# Altium PCB WS485H-V1.PcbDoc
Units mm, origin at the board's own origin, x right, y up, seen from the top; angles counter-clockwise.
Board outline 80.13 x 50.13 mm, 2 copper layers (TopLayer, BottomLayer); 88 components, 71 nets, 303 pads, 390 vias.
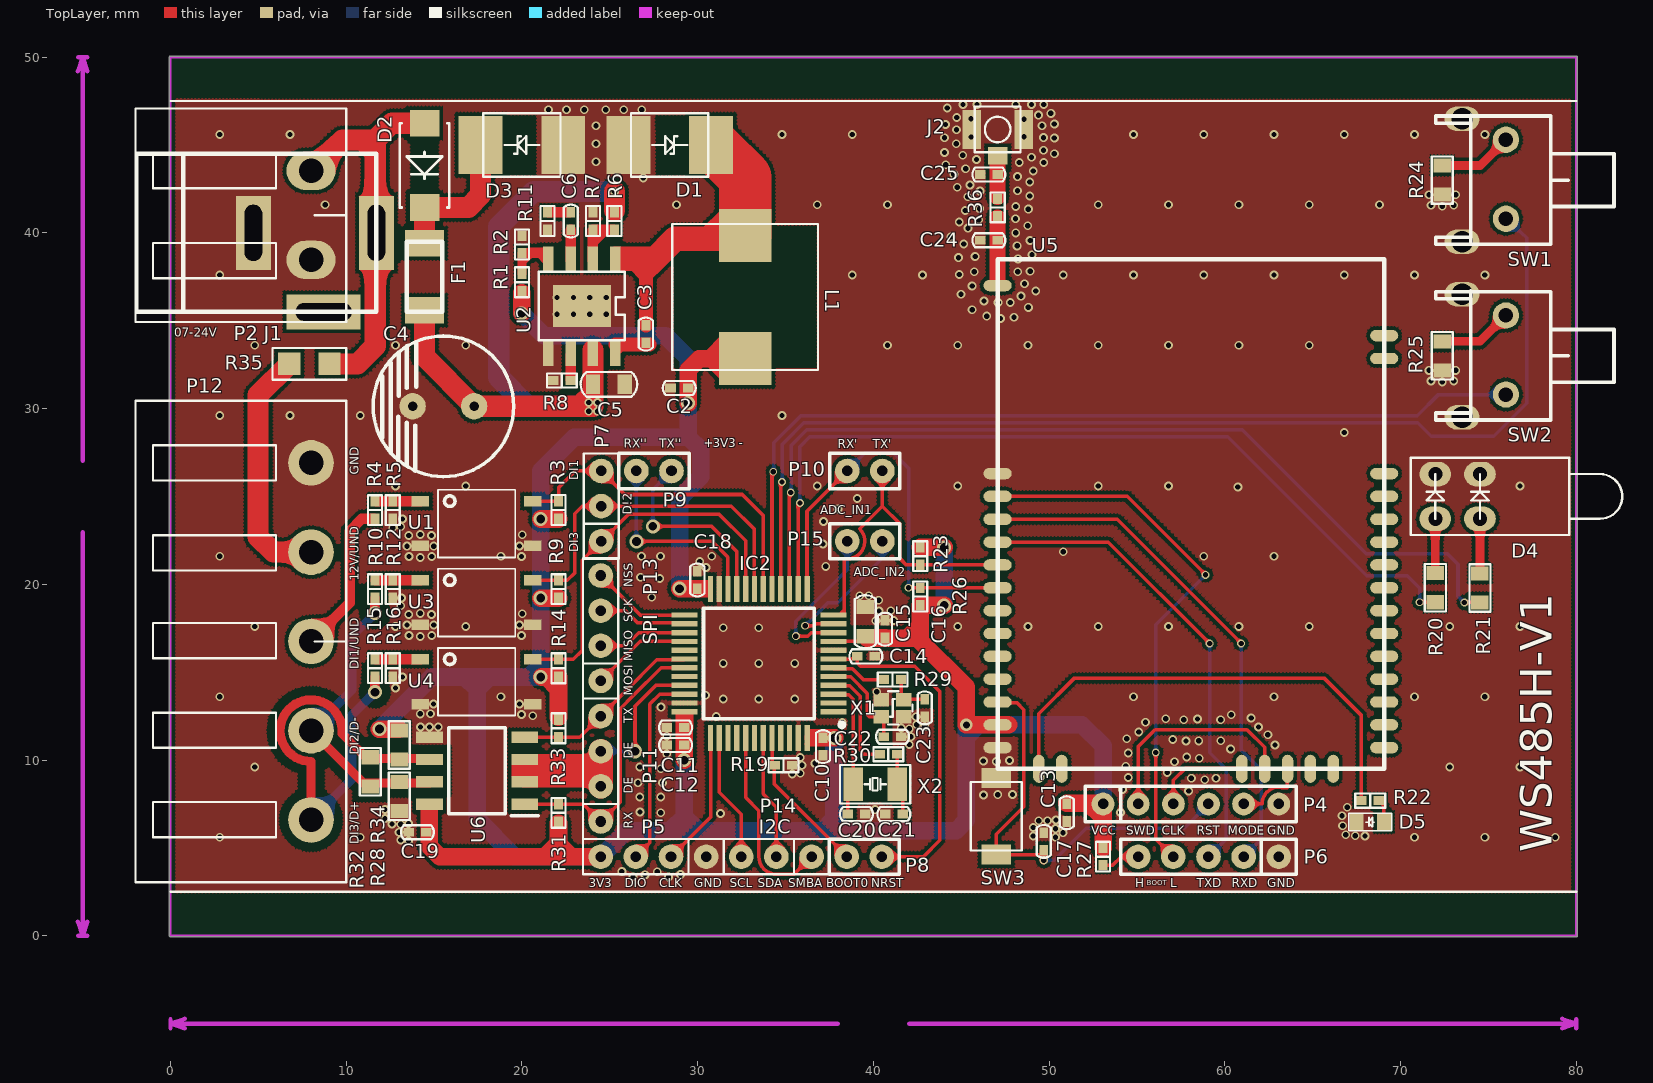
[diagram p0: TopLayer view]
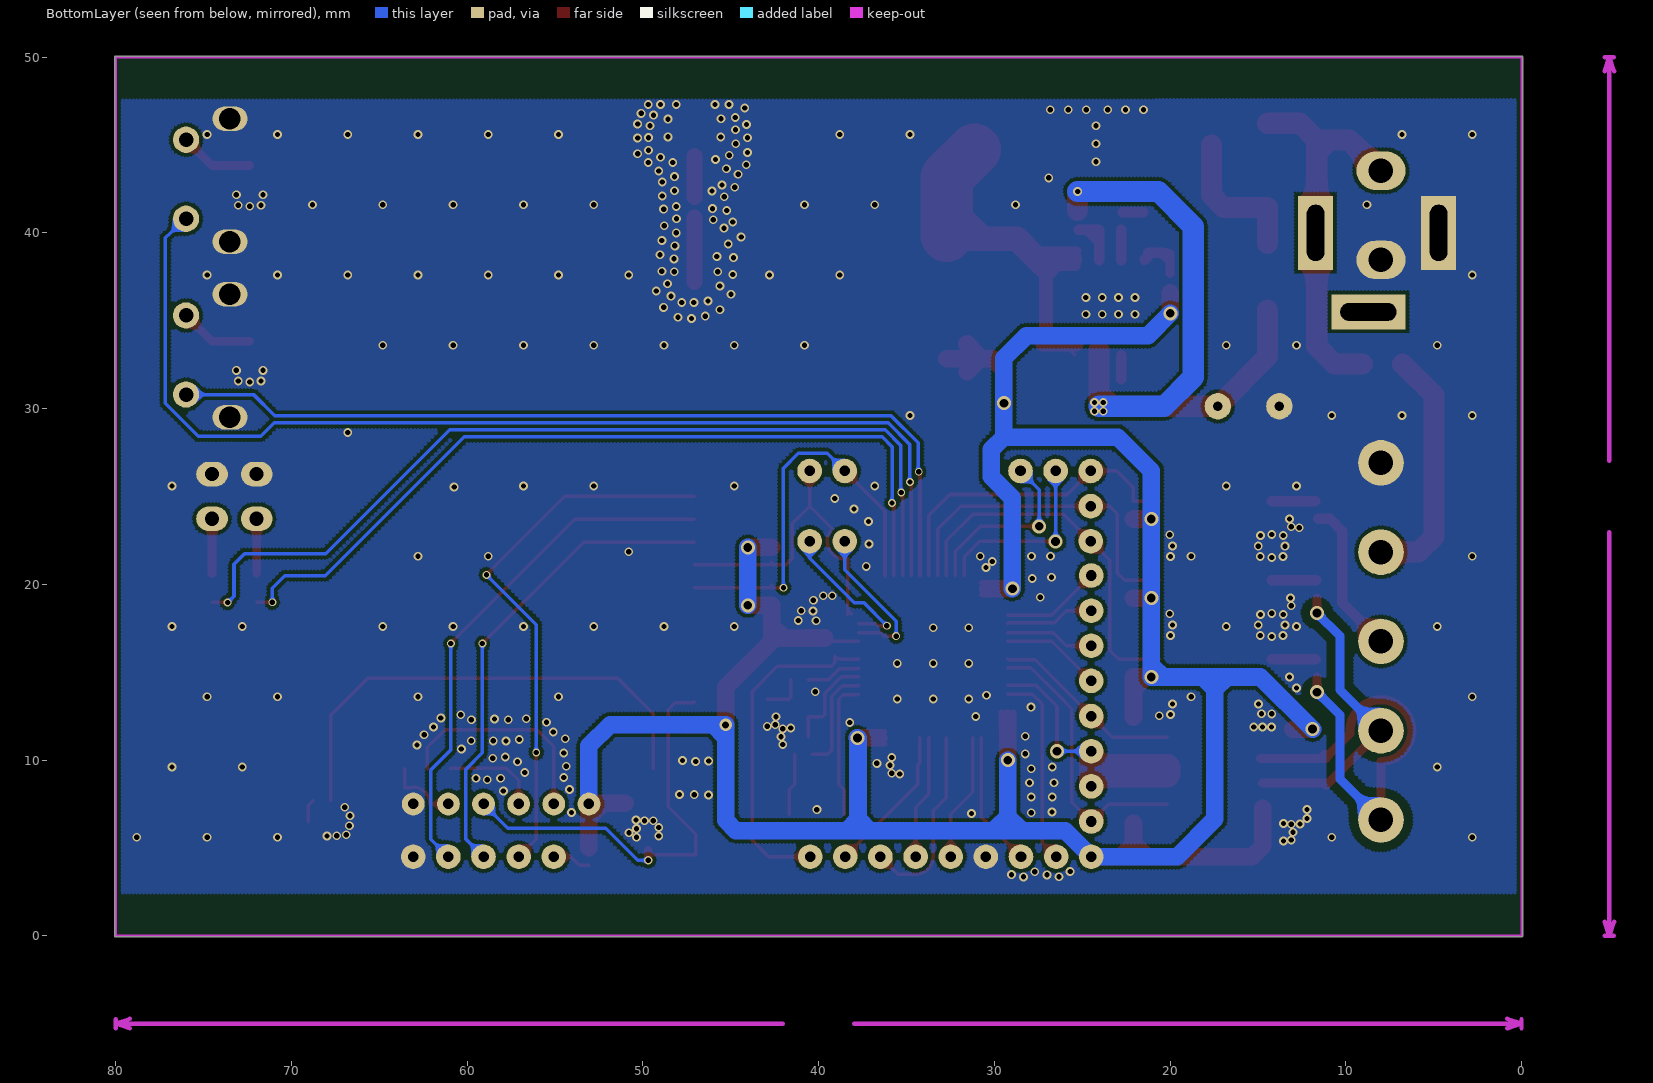
[diagram p1: BottomLayer view, seen from below]

## Layer stack, top to bottom
TopSolder: solder mask 0.0102, Solder Resist, Dk 3.5
TopLayer: signal copper 0.0356
Dielectric1: core 0.32, FR-4, Dk 4.8
BottomLayer: signal copper 0.0356
BottomSolder: solder mask 0.0102, Solder Resist, Dk 3.5

## Board outline
0,-0.064 cw(c0,0) -0.064,0 -0.064,50 cw(c0,50) 0,50.064 80,50.064 cw(c80,50) 80.064,50 80.064,0 cw(c80,0) 80,-0.064

## Design rules (kind name [scope] priority, off if disabled: settings)
Clearance Clearance_2 [(InNet('D+')) vs (InNet('GND'))] p1: gap=0.5 ignorepadtopadclearanceinfootprint=FALSE except(0: Arc-Hole Track-Hole SMDPad-Hole THPad-Hole Via-Hole Fill-Hole Poly-Hole Region-Hole Text-Hole)
Clearance Clearance_1 [(InNet('D-')) vs (InNet('GND'))] p2: gap=0.5 ignorepadtopadclearanceinfootprint=FALSE except(0: Arc-Hole Track-Hole SMDPad-Hole THPad-Hole Via-Hole Fill-Hole Poly-Hole Region-Hole Text-Hole)
Clearance [All] p3: gap=0.2 ignorepadtopadclearanceinfootprint=FALSE except(0: Arc-Hole Track-Hole SMDPad-Hole THPad-Hole Via-Hole Fill-Hole Poly-Hole Region-Hole Text-Hole)
ComponentClearance [All] p1 off: gap=0.254 collisioncheckmode=3 verticalgap=0.254 showdistances=FALSE
DiffPairsRouting [(InNet('D+') AND InNet('D-'))] p1: maxlimit=0.152 minlimit=0.152 mostfreqgap=0.152 toplayer_minwidth=0.381 toplayer_maxwidth=0.381 toplayer_prefwidth=0.381 bottomlayer_minwidth=0.381 bottomlayer_maxwidth=0.381 bottomlayer_prefwidth=0.381 maxuncoupledlength=12.7
FabricationTestPointUsage TestPointUsage [All] p1: valid=0 allowmultiple=FALSE
FabricationTestpoint Testpoint [(IsPad And (OnTopLayer Or OnBottomLayer))] p1: side=3 testpointundercomponent=TRUE minsize=1.016 maxsize=2.54 preferedsize=1.524 minholesize=0.508 maxholesize=1.016 preferedholesize=0.813 testpointgrid=0.025 allowsidetop=TRUE allowsidebottom=TRUE usegrid=TRUE gridtolerance=0
HoleSize [All] p1: absolutevalues=TRUE maxlimit=5.5 minlimit=0.025 maxpercent=80.000 minpercent=20.000
HoleToHoleClearance [All] p1 off: gap=0.254 allowstackedmicrovias=TRUE
MinimumSolderMaskSliver [All] p1 off: minsoldermaskwidth=0.254
PolygonConnect [All] p1: connectstyle=Direct reliefconductorwidth=0.6 reliefentries=4 polygonreliefangle="90 Angle" airgapwidth=0.254
RoutingVias [All] p1: holewidth=0.4 width=0.7 viastyle="Through Hole" minholewidth=0.3 minwidth=0.5 maxholewidth=0.8 maxwidth=0.8
SilkToSilkClearance [All] p1 off: silktosilkclearance=0.254
SilkToSolderMaskClearance SilkscreenOverComponentPads [IsPad] p1 off: minsilkscreentomaskgap=0.254 clearancetoexposedcopper=TRUE
SolderMaskExpansion [All] p1: expansion=0.102 istentingtop=FALSE
Width Width_1 [(InNet('D+') AND InNet('D-'))] p1: maxlimit=0.261 minlimit=0.261 preferedwidth=0.261
Width [All] p2: maxlimit=5 minlimit=0.2 preferedwidth=0.8
21 further rules are at their usual default settings.

## Classes and differential pairs
component class WS485H-V1-BlockDiagram: *1 *2 *3 *4 *5 *6 *7 *8 *9 *10 *11 *12 *13

## Components (designator, comment, footprint, x,y, rotation, side; value= is the part's Value field where it differs from the comment)
C2 "22uF/10V" 0402C 28.953,31.17 r0 top
C3 "0.1uF" 0402C 27.053,34.241 r90 top
C4 "100uF/25V" "DIP CAP-8*3.5" 17.28,30.13 r180 top
C5 "10uF/25V" 0805C 24.95,31.378 r180 top
C6 "150pF" 0402C 22.78,40.673 r270 top
C10 "0.1uF" 0402C 37.134,10.76 r90 top
C11 "0.1uF" 0402C 28.744,11.85 r180 top
C12 "0.1uF" 0402C 28.744,10.85 r180 top value=4.7uf
C13 "0.1uF" 0402C 51.005,7 r90 top
C14 "0.1uF" 0402C 39.572,15.9 r180 top
C15 "0.1uF" 0603C 39.542,17.87 r90 top value=10nF
C16 "0.1uF" 0402C 40.665,17.444 r90 top value=1uF
C17 "0.1uF" 0402C 49.695,5.369 r90 top
C18 "0.1uF" 0402C 29.982,20.248 r90 top
C19 "0.1uF" 0402C 14.05,5.89 r180 top
C20 "10pF" 0402C 39.036,6.92 r0 top
C21 "10pF" 0402C 41.164,6.92 r180 top
C22 "8.2pF" 0402C 41.092,11.326 r0 top
C23 "8.2pF" 0402C 42.92,12.965 r270 top
C24 "NC" 0402C 46.57,39.579 r0 top
C25 "NC" 0402C 46.57,43.321 r0 top
D1 "SS34" SMBJ40CA(TVS) 28.403,45.001 r0 top
D2 "M7A" DIODE-SMA 14.455,46.24 r180 top
D3 "SMBJ24A 600W" SMBJ40CA(TVS) 20,45 r180 top
D4 "LED-TWO" LEDX2HOLD 73.25,25 r270 top
D5 "Green_LED" LED0603--0.4mm 68.275,6.474 r180 top
F1 "FUSE 1206 24V-1A" 1206-FUSE 14.455,37.5 r0 top
IC2 "STM32F301C8T6" QFP50P900X900X160-48N 33.482,15.5 r180 top locked
J1 "DC JACK-2.5T" "DC JACK-2.5T-NEW" 4.713,40 r270 top
J2 "I-PEX-CON" I-PEX-CON 47.07,44.384 r270 top
L1 "15uH" L8.3x8.3 32.7,36.347 r270 top locked
P2 "CON2-5.08mm" OQ5.08-90D-2P 8,41 r270 top
P4 "6PIN-200" 6PIN-200 53.07,7.5 r0 top locked
P5 "4PIN-200" 4PIN-200 30.482,4.5 r180 top value=MicroUSB
P6 "5Pin-200" 5pin-200 63.07,4.5 r180 top
P7 "PIN3" 3PIN-200 24.512,22.45 r90 top
P8 "2PIN-200/NC" 2PIN-200 38.482,4.5 r0 top
P9 "2PIN-200" 2PIN-200 26.512,26.45 r0 top
P10 "2PIN-200" 2PIN-200 40.512,26.45 r180 top
P11 "4PIN-200" 4PIN-200 24.482,6.5 r90 top value=MicroUSB
P12 "HD-515R8 5.08 pitch工業接線端子" OQ5.08-90D-5P 8,16.75 r270 top
P13 "4PIN-200" 4PIN-200 24.482,14.5 r90 top value=MicroUSB
P14 "PIN3" 3PIN-200 36.482,4.5 r180 top
P15 "2PIN-200" 2PIN-200 38.512,22.45 r0 top
R1 "210K 1%" 0402 19.999,37.186 r270 top value="120K 1%"
R2 "40.2K 1%" 0402 19.999,39.341 r270 top
R3 "10K" 0402 22.082,24.225 r270 top
R4 "1K" 0402 11.635,24.222 r90 top
R5 "10K" 0402 12.651,24.222 r90 top
R6 "100K" 0402 25.26,40.673 r90 top
R7 "24.9K" 0402 24.047,40.673 r270 top
R8 "100K" 0402 22.27,31.593 r0 top
R9 "10K" 0402 22.082,19.725 r270 top
R10 "1K" 0402 11.635,19.725 r90 top
R11 "100K" 0402 21.45,40.673 r90 top
R12 "10K" 0402 12.651,19.725 r90 top
R14 "10K" 0402 22.082,15.225 r270 top
R15 "1K" 0402 11.635,15.226 r90 top
R16 "10K" 0402 12.651,15.226 r90 top
R19 "10K" 0402 34.882,9.7 r180 top
R20 "220R" 0603 71.98,19.805 r270 top
R21 "220R" 0603 74.52,19.79 r270 top
R22 "220R" 0402 68.275,7.689 r180 top
R23 "10K" 0402 42.668,21.602 r90 top
R24 "220R" 0603 72.375,43 r270 top
R25 "220R" 0603 72.375,33 r270 top
R26 "10K" 0402 42.668,19.302 r270 top
R27 "1K" 0402 53.07,4.5 r270 top
R28 "3.3K" 0603 13.02,7.935 r90 top
R29 "390R" 0402 41.092,14.579 r0 top
R30 "0R" 0402 40.85,10.324 r0 top
R31 "10K" 0402 22.082,6.995 r270 top
R32 "120R/NC" 0603 11.366,9.33 r90 top
R33 "10K" 0402 22.082,11.805 r90 top
R34 "3.3K" 0603 13.02,10.856 r90 top
R35 "0R" 0805 7.907,32.542 r180 top value=0R/NC
R36 "0R" 0402 47.07,41.45 r90 top
SW1 "DTSM63N" SW-AT-1102VT1-new 74.75,43 r90 top
SW2 "DTSM63N" SW-AT-1102VT1-new 74.75,33 r90 top
SW3 "Push  Button" Button_2pin-3*4*2MM 46.995,6.794 r270 top value=Switch-SMD-6x6mm
U1 "IS181" IS181-SMD 17.416,23.455 r0 top
U2 "MP1584EN-LF-Z" SOIC8E_MP1584EN 23.404,35.834 r180 top
U3 "IS181" IS181-SMD 17.416,18.955 r0 top
U4 "IS181" IS181-SMD 17.416,14.455 r0 top locked
U5 "WS101A" WS101A 58.07,24.002 r0 top locked
U6 "MAX3485" SOIC127P600X175-8N 17.445,9.395 r180 top
X1 "16MHz / 8pF" XTAL-SMD-20X16 41.132,12.965 r0 top
X2 "32.768KHz / 12pF" XTAL-SMD-32*15 40.1,8.62 r0 top

## Footprints (in the part's own frame and the unit in brackets; to place one, negate y for a bottom-side part, rotate by r counter-clockwise, add the part's x,y. Pads: shape width x height; smd on the part's side, far side on the other; paste and mask are expansions set on the pad)
2PIN-200 [mm] "Connector; Header; 2 Position"
  round 1.4 hole 0.6: 1(0,0) 2(2,0)
  silkscreen extent -1,-1 3,1
3PIN-200 [mm]
  round 1.4 hole 0.6: 1(0,0) 2(2,0) 3(4,0)
  silkscreen extent -1,-1 5,1
4PIN-200 [mm]
  round 1.4 hole 0.6: 1(0,0) 2(2,0) 3(4,0) 4(6,0)
  silkscreen extent -1,-1 7,1
5pin-200 [mm]
  round 1.4 hole 0.6: 1(0,0) 2(2,0) 3(4,0) 4(6,0) 5(8,0)
  silkscreen extent -1,-1 9,1
6PIN-200 [mm]
  round 1.3 hole 0.6: 1(0,0) 2(2,0) 3(4,0) 4(6,0) 5(8,0) 6(10,0)
  silkscreen extent -1,-1 11,1
0402 [mm]
  rect 0.6x0.5 smd: 1(-0.5,0) 2(0.5,0)
  silkscreen extent -0.85,-0.4 0.85,0.4
0402C [mm]
  rect 0.6x0.5 smd: 1(-0.5,0) 2(0.5,0)
  silkscreen extent -0.94,-0.4 0.94,0.4
0603 [mm]
  rect 0.8x1 smd: 1(-0.826,0) 2(0.826,0)
  silkscreen extent -1.35,-0.6 1.35,0.6
0603C [mm]
  rect 0.8x1 smd: 1(-0.826,0) 2(0.826,0)
  silkscreen extent -1.51,-0.6 1.51,0.6
0805 [mil]
  rect 50x50 smd: 1(-45,0) 2(45,0)
  silkscreen extent -82,-35 83,35
0805C [mm] "0805C"
  rect 0.8x1.1 smd: 1(-0.9,0) 2(0.9,0)
  silkscreen extent -1.61,-0.7 1.61,0.7
1206-FUSE [mm] "1206-FUSE"
  rect 2.2x1.5 smd: 1(0,1.905) 2(0,-1.905)
  silkscreen extent -1,-2 1,2
Button_2pin-3*4*2MM [mm] "Button_2pin-3*4*2MM"
  rect 1.15x1.7 smd: 1(2.175,0) 2(-2.175,0)
  silkscreen extent -1.95,-1.45 1.95,1.45
"DC JACK-2.5T-NEW" [mm] "DC JACK-2.5T-NEW"
  rect 4.2x2 hole 1 slot 3.2 at 0 deg: 1(0,7) 2(0,0)
  rect 2x4.2 hole 1 slot 3.2 at 90 deg: 3(4.498,4.001)
  silkscreen extent -4.5,-6.65 4.5,7
DIODE-SMA [mm]
  rect 1.68x1.52 smd: 1(0,0) 2(0,4.8)
  silkscreen extent -1.4,0 1.4,4.8
"DIP CAP-8*3.5" [mm]
  round 1.5 hole 0.55: 1(0,0) 2(3.5,0)
  silkscreen extent -2.25,-4 5.75,4
I-PEX-CON [mm]
  rect 1x1.1 smd: 1(0,0)
  rect 2.2x1.05 smd: 2(-1.5,1.475) 2(-1.5,-1.475)
  silkscreen extent -2.8,-1.3 -0.2,1.3
IS181-SMD [mm] "IS181-SMD"
  rect 1x0.6 smd: 1(-3.2,1.27) 2(-3.2,-1.27) 3(3.2,-1.27) 4(3.2,1.27)
  silkscreen extent -2.2,-1.93 2.2,1.93
L8.3x8.3 [mm]
  rect 3x3 smd: 1(-3.5,0) 2(3.5,0)
  silkscreen extent -4.15,-4.15 4.15,4.15
LED0603--0.4mm [mm] "LED0603--0.4mm"
  rect 0.8x0.9 smd: 1(-0.775,0) 2(0.775,0)
  silkscreen extent -1.23,-0.5 1.23,0.5
LEDX2HOLD [mm]
  oval 1.4x1.8 hole 0.8: 1(1.27,1.27) 2(-1.27,1.27) 3(1.27,-1.27) 4(-1.27,-1.27)
  silkscreen extent -2.2,-2.67 2.2,9.37
OQ5.08-90D-2P [mm]
  oval 2.2x2.8 hole 1.4: 1(-2.54,0) 2(2.54,0)
  silkscreen extent -6.08,-10 6.08,2
OQ5.08-90D-5P [mm]
  round 2.6 hole 1.4: 1(-10.16,0) 2(-5.08,0) 3(0,0) 4(5.08,0) 5(10.16,0)
  silkscreen extent -13.7,-10 13.7,2
QFP50P900X900X160-48N [mm]
  rect 1.475x0.3 smd: 1(-4.238,2.75) 2(-4.238,2.25) 3(-4.238,1.75) 4(-4.238,1.25) 5(-4.238,0.75) 6(-4.238,0.25) 7(-4.238,-0.25) 8(-4.238,-0.75) 9(-4.238,-1.25) 10(-4.238,-1.75) 11(-4.238,-2.25) 12(-4.238,-2.75) 25(4.238,-2.75) 26(4.238,-2.25) 27(4.238,-1.75) 28(4.238,-1.25) 29(4.238,-0.75) 30(4.238,-0.25) 31(4.238,0.25) 32(4.238,0.75) 33(4.238,1.25) 34(4.238,1.75) 35(4.238,2.25) 36(4.238,2.75)
  rect 0.3x1.475 smd: 13(-2.75,-4.238) 14(-2.25,-4.238) 15(-1.75,-4.238) 16(-1.25,-4.238) 17(-0.75,-4.238) 18(-0.25,-4.238) 19(0.25,-4.238) 20(0.75,-4.238) 21(1.25,-4.238) 22(1.75,-4.238) 23(2.25,-4.238) 24(2.75,-4.238) 37(2.75,4.238) 38(2.25,4.238) 39(1.75,4.238) 40(1.25,4.238) 41(0.75,4.238) 42(0.25,4.238) 43(-0.25,4.238) 44(-0.75,4.238) 45(-1.25,4.238) 46(-1.75,4.238) 47(-2.25,4.238) 48(-2.75,4.238)
  silkscreen extent -4.85,-3.15 3.15,3.62, body extent -4.5,-4.5 4.5,4.5, height 1.6
SMBJ40CA(TVS) [mm] "SMBJ40CA(TVS)"
  rect 2.5x3.3 smd: 1(-2.35,0) 2(2.35,0)
  silkscreen extent -2.2,-1.81 2.2,1.81
SOIC8E_MP1584EN [mm] "SOIC8E_MP1584EN"
  rect 3.3x2.41 smd: 0(0,0)
  rect 0.6x1.4 smd: 1(-1.905,-2.7) 2(-0.635,-2.7) 3(0.635,-2.7) 4(1.905,-2.7) 5(1.905,2.7) 6(0.635,2.7) 7(-0.635,2.7) 8(-1.905,2.7)
  silkscreen extent -2.45,-1.95 2.45,1.95
SOIC127P600X175-8N [mm]
  rect 1.525x0.65 smd: 1(-2.712,1.905) 2(-2.712,0.635) 3(-2.712,-0.635) 4(-2.712,-1.905) 5(2.712,-1.905) 6(2.712,-0.635) 7(2.712,0.635) 8(2.712,1.905)
  silkscreen extent -3.47,-2.45 1.6,2.58, body extent -3,-2.45 3,2.45, height 1.75
SW-AT-1102VT1-new [mm] "SW-AT-1102VT1-new"
  oval 1.4x2 hole 1.227: 0(-3.5,1.25) 0(3.5,1.25)
  round 1.5 hole 0.827: 1(-2.2,-1.25) 2(2.3,-1.25)
  silkscreen extent -3.65,-7.4 3.7,2.75
WS101A [mm] "Vertexcom"
  oval 1.6x0.65 smd: 1(-11,13) 2(-11,2.3) 3(-11,1) 4(-11,-0.3) 5(-11,-1.6) 6(-11,-2.9) 7(-11,-4.2) 8(-11,-5.5) 9(-11,-6.8) 10(-11,-8.1) 11(-11,-9.4) 12(-11,-10.7) 13(-11,-12) 14(-11,-13.3) 22(11,-13.3) 23(11,-12) 24(11,-10.7) 25(11,-9.4) 26(11,-8.1) 27(11,-6.8) 28(11,-5.5) 29(11,-4.2) 30(11,-2.9) 31(11,-1.6) 32(11,-0.3) 33(11,1) 34(11,2.3) 35(11,8.85) 36(11,10.15)
  oval 0.65x1.6 smd: 15(-8.65,-14.5) 16(-7.35,-14.5) 17(2.9,-14.5) 18(4.2,-14.5) 19(5.5,-14.5) 20(6.8,-14.5) 21(8.1,-14.5)
  silkscreen extent -11,-14.5 11,14.5
XTAL-SMD-20X16 [mm] "XTAL-SMD-20X16"
  rect 0.875x0.775 smd: 1(-0.675,-0.5) 2(0.6,0.475) 3(0.6,-0.5) 4(-0.675,0.475)
  silkscreen extent -1.18,-0.95 1.1,0.95
XTAL-SMD-32*15 [mm]
  rect 1.1x1.9 smd: 1(-1.25,0) 2(1.25,0)
  silkscreen extent -2,-1.1 2,1.1

## Part data
C2 C3 C5 C6 C10 C11 C12 C14 C15 C16 C17 C18: library part "Cap Semi", "Capacitor (Semiconductor SIM Model)", LatestRevisionDate=17-Jul-2002, LatestRevisionNote="Re-released for DXP Platform.", PackageReference=C1206, Published=8-Jun-2000, Publisher="Altium Limited"
C4: library part "C POL", Package Height=1.8mm, Part Number=53300833000, Rating=10V, Tolerance=20%, Bottom=20, PCB_dir=0.000000, PCB_loc=Top, PCB_x=19.129500, PCB_y=12.184000, Right=20
C13 C20 C21 C22 C23 C24 C25: library part CAP, "Capacitor"
C19: library part CAP
D1: library part "DIODE SCHOTTKY", "Schottky Diode"
D2: library part ZNQ, "Zener Diode"
D3: library part PESD5V0L1BA, "Zener Diode"
D5: library part LED, Manufacturer=Citizen, Manufacturer's Part Number=CL-170G-CD-T, Old Part Number=4317000, Package Height=1.1mm, Part Number=41100017000, VALUE_ALLEGRO=Red_LED, Bottom=20, Cost=0.48, FPLIST=mot/0805LED,dig/0805led, PCB_dir=90.000000, PCB_x=46.095000, PCB_y=6.420000, Right=40
F1: library part FUSE2, "Fuse"
IC2: "Integrated Circuit", Manufacturer_Name=STMicroelectronics, Datasheet Link=https://www.st.com/resource/en/datasheet/stm32f301c8.pdf, Height=1.6mm, Manufacturer_Part_Number=STM32F301C8T6
J1: library part DCJACK-1, "Low Voltage Power Supply Connector"
J2 P2 P8 P9 P10 P15: library part CON2, "Connector"
L1: library part Inductor, "Inductor", Code_IEC=1005, Code_JEITA=0402, LatestRevisionDate=17-Jul-2002, LatestRevisionNote="Re-released for DXP Platform.", PackageReference=0402-A, Published=8-Jun-2000, Publisher="Altium Limited"
P4: "Pin Header", LatestRevisionDate=17-Jul-2002, LatestRevisionNote="Re-released for DXP Platform.", Publisher="Altium Limited"
P5 P11 P13: library part CON4, "Connector"
P6: library part PIN5
P7 P14: "Connector"
P12: library part "Header 5", "Header, 5-Pin", LatestRevisionDate=17-Jul-2002, LatestRevisionNote="Re-released for DXP Platform.", Publisher="Altium Limited"
R1 R2 R3 R4 R5 R6 R7 R8 R9 R10 R11 R12 R14 R15 R16 R19 R20 R21 R22 R23 R24 R25 R26 R27 R28 R29 R30 R31 R32 R33 R34 R35 R36: library part "Res Semi", "Semiconductor Resistor", LatestRevisionDate=17-Jul-2002, LatestRevisionNote="Re-released for DXP Platform.", PackageReference=AXIAL-0.5, Published=8-Jun-2000, Publisher="Altium Limited"
SW1 SW2: library part SW1
SW3: library part SW1, "Push Button"
U1 U3 U4: library part Optoisolator1, "4-Pin Phototransistor Optocoupler", DatasheetDocument=Nov-2003, LatestRevisionDate=04-Mar-2005, LatestRevisionNote="Sch pins 3 & 4 Swapped.", PackageReference=DIP-4, Published=24-Mar-1999, Publisher="Altium Limited"
U6: library part ISL3178EIBZ-T, "Integrated Circuit", Manufacturer_Name="Renesas Electronics", Datasheet Link=https://www.renesas.com/en-us/www/doc/datasheet/isl3170e-71e-72e-73e-74e-75e-76e-77e-78e.pdf, Height=1.75mm, Manufacturer_Part_Number=ISL3178EIBZ-T
X1: library part XTAL-SMD-25*32
X2: library part XTAL, Text Field1=20, Text Field2=20

## Via types
v1: diameter 0.5, hole 0.3, TopLayer to BottomLayer, tented both sides, 356 vias
v2: diameter 0.8, hole 0.5, TopLayer to BottomLayer, tented both sides, 16 vias
v3: diameter 0.45, hole 0.3, TopLayer to BottomLayer, tented both sides, 13 vias
v4: diameter 0.5, hole 0.3, TopLayer to BottomLayer, tented bottom, 4 vias
v5: diameter 0.7, hole 0.4, TopLayer to BottomLayer, tented both sides, 1 vias

## Nets (pads, with @x,y where several pads share a name; then routed paths per layer and width w, separated by ;. In a path a pad name is that pad's centre, name@x,y a point inside that pad or via, vN(x,y) a via of type N, cw(c..) or ccw(c..) an arc to the next point about the centre after c; other vN are vias at no path point)
3V3: C2.2 C10.2 C11.1 C12.1 C13.2 C15.1 C16.1 C18.1 C19.1 IC2.9 IC2.24 IC2.36 IC2.48 L1.2 P4.1 P5.4 R1.2 R3.2 R9.2 R14.2 R23.2 R26.2 R27.1 R31.2 R33.2 R34.2 U5.13 U6.8 | length 197.3
  TopLayer w0.2: IC2.9 39.248,16.75 C15.1
  TopLayer w0.3: 28.894,11.84 IC2.36@28.894,12.738 ; 29.599,11.84 IC2.36@29.599,12.738 ; 29.834,19.392 IC2.24@30.732,19.392 ; 29.834,20.086 IC2.24@30.732,20.086 ; IC2.48@36.244,10.91 37.142,10.91 ; IC2.48@36.252,11.61 37.15,11.61
  TopLayer w0.6: 21.22,4.687 21.922,5.389 ; v2@21.236,14.59 21.938,13.888 ; 22.231,5.338 22.933,4.636 ; 41.94,17.21 42.4,17.67 ; 52.149,7.351 52.851,6.649
  TopLayer w1: v2(11.89,11.758) R34.2@13.018,11.758 ; U6.8@14.732,7.248 14.732,5.086 15.318,4.5 22.082,4.5 P5.4 ; v2(19.984,35.423) R1.2@19.984,36.584 ; v2(21.066,19.216) 22.081,19.216 R9.2@22.082,19.215 ; v2(21.066,23.715) R3.2@22.082,23.715 ; v2@21.117,14.723 22.08,14.723 22.082,14.721 R33.2@22.082,12.439 ; 22.082,4.54 R31.2@22.082,6.4 ; v2(28.973,19.752) C18.1@29.981,19.745 ; v2(29.232,9.991) 29.244,10.003 C12.1 29.244,11.25 29.248,11.85 29.249,11.987 29.249,12 29.252,12.378 ; v2(29.453,30.309) C2.2 29.453,32.214 30.086,32.847 L1.2 ; C18.1@29.982,19.745 30.372,19.742 ; 30.904,32.726 L1.2@31.536,32.094 ; 30.924,33.044 L1.2@31.556,33.676 ; 36.582,11.26 C10.2 v2(37.792,11.26) ; C15.1@39.642,16.944 C16.1 40.669,16.94 41.94,16.94 42.508,16.94 45.293,14.155 v5(45.293,12.002) U5.13 U5.13@47.69,12.002 ; 42.667,16.781 R26.2 R26.2 v2(44.03,18.802) ; R23.2 v2(44.03,22.102) ; C13.2@51.005,7.544 53.07,7.544 P4.1 R27.1
  BottomLayer w0.6: 16.601,14.579 17.303,13.877 ; 17.589,13.879 18.291,14.581 ; 20.215,14.837 20.917,15.539 ; 28.381,6.214 29.083,6.916 ; 29.346,6.951 30.048,6.249 ; 36.909,6.094 37.611,6.796 ; 37.871,6.792 38.573,6.09 ; 45.442,11.157 46.144,11.859
  BottomLayer w1: v2(11.89,11.758) 14.855,14.723 17.445,14.723 ; 18.443,14.723 17.445,14.723 ; 18.451,14.723 v2(21.066,14.723) v2(21.066,19.216) v2(21.066,23.715) 21.066,26.466 22.98,28.38 29.473,28.38 ; v2(19.984,35.423) 21.257,34.15 28.17,34.15 29.453,32.867 v2(29.453,30.309) 29.453,28.4 29.473,28.38 ; v2(28.973,19.752) 28.973,24.911 30.18,26.118 30.18,27.673 29.473,28.38 ; 29.232,6.1 v2(29.232,9.991) ; v2(37.792,11.26) 37.76,11.228 37.76,5.98 ; v2(44.03,18.802) v2(44.03,22.102) ; P4.1 53.07,10.8 51.868,12.002 v5(45.293,12.002) 45.293,6.566 44.707,5.98 37.76,5.98 ; 17.445,14.723 17.445,6.645 19.59,4.5 P5.4 25.962,5.98 30.048,5.98 37.76,5.98
12V: D2.1 J1.1 P2.1 R35.1 | length 23.3
  TopLayer w0.6: 10.738,45.037 11.44,44.335
  TopLayer w1.2: P2.1@8,43.5 9.785,45.285 10.738,45.285 11.65,45.285 ; R35.1 10.642,32.542 11.65,33.55 11.65,40 11.65,44.335 11.65,45.285 ; D2.1 12.605,46.24 11.65,45.285
ADC1_IN1: IC2.10 P15.1 | length 8.8
  TopLayer w0.2: v3(35.586,17.05) 36.27,17.05 36.46,17.24 37.71,17.24 IC2.10
  BottomLayer w0.2: v3(35.586,17.05) 35.586,17.896 38.512,20.822 P15.1
ADC1_IN2: IC2.11 P15.2 | length 8.6
  TopLayer w0.2: v3(36.116,17.64) 36.632,17.64 36.742,17.75 IC2.11
  BottomLayer w0.2: v3(36.116,17.64) 37.416,18.94 37.97,18.94 40.512,21.482 P15.2
BACKUP-BUTTOM: U5.20
BOOT: P6.4 U5.3 | length 31.3
  TopLayer w0.2: U5.3 54.443,25.002 v3(58.905,20.54) ; v3(56.07,10.434) 56.07,5.5 P6.4
  BottomLayer w0.2: v3(56.07,10.434) 56.07,17.705 v3(58.905,20.54)
BOOT0: IC2.44 P8.1 R19.2 | length 8.5
  TopLayer w0.2: IC2.44 34.232,9.84 34.372,9.7 34.372,8.628 38.482,4.518 P8.1
D+: P12.5 R15.1 R32.2 R34.1 U6.6 | length 27.6
  TopLayer w0.514: 7.98,9.913 cw(c8,11.67) 9.75,11.518 10.97,10.299 11.223,10.299 R32.2 ; P12.5 8,9.893 ; R32.2@10.955,10.314 R32.2@11.164,10.104 ; R32.2@11.134,10.097 U6.6@14.861,10.097 ; v2(11.631,13.86) v2@11.635,13.864 ; v2@11.636,13.864 R15.1
  BottomLayer w0.514: P12.5 10.34,8.93 10.34,12.569 v2(11.631,13.86)
D-: P12.4 R10.1 R28.2 R32.1 U6.7 | length 17.2
  TopLayer w0.514: P12.4 R32.1@11.13,8.54 ; R32.1@11.006,8.693 U6.7@14.733,8.693 ; R10.1 11.635,18.365 v2(11.64,18.36)
  BottomLayer w0.514: P12.4 10.34,14.01 10.34,17.06 v2(11.64,18.36)
DI1: P12.3 R4.1 | length 8.8
  TopLayer w0.6: P12.3 10.19,18.94 10.19,23.02 10.892,23.722 R4.1@11.556,23.722
GND: C2.1 C4.2 C5.1 C10.1 C11.2 C12.2 C13.1 C14.1 C15.2 C16.2 C17.2 C18.2 C19.2 C20.2 C21.2 C22.2 C23.2 C24.1 C25.1 D1.1 D3.1 D4.2 D4.4 D5.2 IC2.8 IC2.23 IC2.35 IC2.47 J1.2 J2.2 P2.2 P4.6 P5.1 P6.1 P12.1 R2.1 R5.1 R7.1 R8.1 R11.1 R12.1 R16.1 R19.1 R24.2 R25.2 R28.1 SW1.0 SW2.0 SW3.2 U1.2 U1.3 U2.0 U2.5 U3.2 U3.3 U4.2 U4.3 U5.2 U5.14 U6.5 X1.3 X1.4
  other v1: 26.318,3.353 28.341,3.35 27.009,3.464 29.029,3.477 27.703,3.638 25.687,3.656 13.55,5.39 13.099,5.444 2.8,5.6 10.8,5.6 50.36,5.6 70.8,5.6 74.8,5.6 78.8,5.6 49.1,5.67 67.428,5.686 67.975,5.68 66.88,5.746 50.79,5.86 13,5.89 50.368,6.095 49.1,6.16 66.705,6.255 12.6,6.36 13.099,6.339 13.55,6.39 49.41,6.54 49.903,6.541 50.394,6.586 12.21,6.67 66.672,6.83 31.299,6.954 27.9,7 54.069,7.019 26.713,7.041 12.21,7.18 40.1,7.177 66.962,7.317 26.7,7.9 27.9,7.9 46.27,8.01 47.08,8.03 47.92,8.04 57.94,8.24 54.18,8.32 26.6,8.7 28,8.7 58.86,8.88 58.096,8.963 59.496,8.963 54.503,9 35.382,9.2 35.833,9.251 56.722,9.294 27.9,9.5 4.8,9.6 26.7,9.6 72.8,9.6 76.8,9.6 54.36,9.65 35.932,9.7 36.685,9.809 57.14,9.9 46.26,9.94 47,9.92 47.75,9.97 58.546,10.097 35.833,10.146 57.83,10.17 28.244,10.35 54.503,10.4 60.33,10.63 62.86,10.85 42.043,10.877 57.79,11.08 58.52,11.09 59.77,11.1 57.034,11.163 54.42,11.21 42.142,11.326 28.244,11.35 28.244,11.35 62.45,11.44 55.097,11.599 42.043,11.772 41.592,11.826 61.918,11.874 14.232,11.88 14.733,11.88 14.733,11.88 15.234,11.88 42.92,11.915 42.471,12.014 38.23,12.13 55.492,12.154 57.662,12.297 59.762,12.297 58.45,12.33 56.64,12.35 61.497,12.39 31.058,12.473 42.42,12.465 20.616,12.525 19.977,12.584 60.36,12.58 14.216,12.625 14.797,12.636 27.907,13.009 14.966,13.185 19.856,13.185 19.856,13.185 31.452,13.47 33.472,13.47 35.522,13.47 2.8,13.6 18.8,13.6 54.8,13.6 62.8,13.6 70.8,13.6 74.8,13.6 30.44,13.684 40.19,13.89 40.19,13.89 12.8,14.1 13.201,14.726 31.452,15.5 33.482,15.5 35.522,15.5 14.216,17.025 13.577,17.084 14.872,17.084 19.977,17.084 31.452,17.53 33.472,17.53 4.8,17.6 12.8,17.6 16.8,17.6 44.8,17.6 48.8,17.6 52.8,17.6 56.8,17.6 60.8,17.6 64.8,17.6 72.8,17.6 76.8,17.6 13.456,17.685 13.456,17.685 14.976,17.685 14.976,17.685 19.866,17.685 40.141,17.921 41.165,17.944 13.56,18.286 14.855,18.286 20.015,18.324 14.216,18.345 40.32,18.48 40.99,18.49 13.097,18.774 40.299,19.096 13.151,19.225 27.39,19.26 39.23,19.35 39.742,19.345 27.84,20.33 26.75,20.4 30.48,20.95 37.29,21.02 30.12,21.3 14.216,21.525 2.8,21.6 13.577,21.584 14.872,21.584 18.8,21.6 19.977,21.584 26.8,21.6 27.88,21.59 30.8,21.6 58.8,21.6 62.8,21.6 50.8,21.852 13.456,22.17 13.456,22.185 14.976,22.17 14.976,22.185 19.866,22.185 37.13,22.29 13.56,22.771 14.855,22.771 14.216,22.83 20.015,22.824 12.651,23.222 13.102,23.273 37.16,23.58 13.201,23.722 37.98,24.29 39.077,24.889 60.743,25.543 12.8,25.6 16.8,25.6 36.8,25.6 44.8,25.6 52.8,25.6 56.8,25.6 76.8,25.6 66.8,28.64 2.8,29.6 6.8,29.6 10.8,29.6 34.8,29.6 72.375,31.514 71.736,31.574 73.031,31.574 71.615,32.175 73.135,32.175 4.8,33.6 12.8,33.6 16.8,33.6 40.8,33.6 44.8,33.6 48.8,33.6 52.8,33.6 56.8,33.6 60.8,33.6 64.8,33.6 47.24,35.12 48,35.2 46.456,35.26 22,35.362 22.93,35.362 23.86,35.362 24.79,35.362 45.62,35.63 48.82,35.76 47.1,36.04 47.79,36.04 46.3,36.12 22,36.317 22.93,36.317 23.86,36.317 24.79,36.317 48.4,36.4 44.99,36.51 49.24,36.69 45.62,36.97 48.6,37.1 2.8,37.6 38.8,37.6 42.8,37.6 50.8,37.6 54.8,37.6 58.8,37.6 62.8,37.6 66.8,37.6 70.8,37.6 74.8,37.6 44.89,37.63 45.74,37.79 48.22,37.79 48.92,37.82 48.23,38.52 44.84,38.59 45.79,38.65 49.03,38.75 48.18,39.26 45.14,39.37 48.92,39.56 44.41,39.77 48.1,40 45.39,40.27 48.78,40.4 44.883,40.619 46,40.75 48.092,40.798 45.226,41.278 48.82,41.35 46.037,41.38 48.1,41.5 72.375,41.514 71.736,41.574 73.031,41.574 8.8,41.6 28.8,41.6 36.8,41.6 36.8,41.6 40.8,41.6 52.8,41.6 56.8,41.6 60.8,41.6 64.8,41.6 68.8,41.6 45.37,42.05 48.9,42.1 71.615,42.175 73.135,42.175 46.068,42.386 48.2,42.4 44.77,42.59 45.499,42.728 48.9,42.9 26.905,43.13 48.2,43.2 44.58,43.34 49.1,43.52 45.25,43.65 44.12,43.88 48.3,44 49.7,44 24.215,44.051 45.872,44.17 49,44.3 45.09,44.42 50.3,44.5 44.052,44.578 49.68,44.7 44.72,45.07 24.215,45.074 50.3,45.4 44.047,45.41 49.68,45.42 2.8,45.6 6.8,45.6 34.8,45.6 38.8,45.6 54.8,45.6 58.8,45.6 62.8,45.6 66.8,45.6 70.8,45.6 74.8,45.6 44.73,45.87 24.215,46.097 49.6,46.1 44.102,46.168 50.3,46.2 44.75,46.57 49.4,46.7 50.1,46.8 21.51,47.01 22.53,47.01 23.55,47.01 24.775,47.01 25.795,47.01 26.815,47.01 44.2,47.1 45.1,47.3 45.9,47.3 48.1,47.3 49,47.3 49.7,47.3
  other v4: 45.564,45.458 48.568,45.463 45.56,46.49 48.568,46.473
I2C1_SCL: IC2.38 P14.3 | length 7.3
  TopLayer w0.2: IC2.38 31.232,8.168 32.482,6.918 P14.3
I2C1_SDA: IC2.43 P14.2 | length 7.1
  TopLayer w0.2: IC2.43 33.732,8.068 34.482,7.318 P14.2
I2C1_SMBA: IC2.41 P14.1 | length 11.1
  TopLayer w0.2: IC2.41 32.732,7.868 33.482,7.118 33.482,4.5 ccw(c34.482,4.5) 34.482,3.5 35.482,3.5 P14.1
"IOA9-DC ON": U5.21
KEY0: IC2.16 SW1.1 | length 62.5
  TopLayer w0.2: 34.722,20.488 34.722,25.717 34.797,25.792 v3(34.797,25.82)
  BottomLayer w0.2: v3(34.797,25.82) 34.825,25.848 34.825,27.969 36.046,29.19 70.983,29.19 71.743,28.43 75.31,28.43 77.18,30.3 77.18,39.72 SW1.1
KEY1: IC2.17 SW2.1 | length 50.4
  TopLayer w0.2: 34.222,20.488 34.23,20.496 34.23,26.301 34.3,26.371 v3(34.3,26.406)
  BottomLayer w0.2: v3(34.3,26.406) 34.335,26.441 34.335,28.045 35.88,29.59 70.947,29.59 72.157,30.8 SW2.1
LED1: IC2.14 R20.2 | length 48.1
  TopLayer w0.2: 35.722,20.488 35.722,24.462 35.822,24.562 v3(35.822,24.63) ; v3(71.09,18.979) R20.2
  BottomLayer w0.2: v3(35.822,24.63) 35.822,27.835 36.377,28.39 60.169,28.39 68.079,20.48 70.382,20.48 71.09,19.772 v3(71.09,18.979)
LED2: IC2.15 R21.2 | length 52.2
  TopLayer w0.2: 35.222,20.488 35.222,25.13 35.297,25.205 v3(35.297,25.23) ; v3(73.63,18.965) R21.2
  BottomLayer w0.2: v3(35.297,25.23) 35.322,25.255 35.322,27.901 36.211,28.79 60.998,28.79 68.041,21.747 72.67,21.747 73.27,21.147 73.27,19.325 v3(73.63,18.965)
LED_G: IC2.20 P7.1 R14.1 U4.4 | length 21.2
  TopLayer w0.2: U4.4 R14.1 22.925,15.725 23.43,16.23 23.43,21.368 P7.1 24.536,22.45 26.086,24 31.21,24 32.73,22.48 32.73,20.496 32.722,20.488
LED_R: IC2.18 P7.3 R3.1 U1.4 | length 18.7
  TopLayer w0.2: U1.4 R3.1 22.082,25.49 23.042,26.45 P7.3 25.852,25.11 32.53,25.11 33.722,23.918 33.722,20.488
LED_Y: IC2.19 P7.2 R9.1 U3.4 | length 19.5
  TopLayer w0.2: U3.4 R9.1 22.585,20.225 23,20.64 23,24.02 23.43,24.45 P7.2 31.92,24.45 33.207,23.163 33.207,20.503 33.222,20.488
MODE: P4.5 U5.19 | length 4.1
  TopLayer w0.2: P4.5 62.12,7.5 cw(c63.07,7.5) 63.246,8.434 63.364,8.411 ; 63.365,8.411 63.565,8.411 63.565,9.497 U5.19
NetC3_1: C3.1 U2.8 | length 2.5
  TopLayer w0.2: U2.8@25.426,33.063 25.788,33.425
  TopLayer w0.8: U2.8@25.33,33.641 C3.1@27.27,33.641
NetC3_2: C3.2 D1.2 L1.1 U2.1 | length 21.6
  TopLayer w0.5: U2.1@25.289,38.984 25.837,38.984 ; U2.1@25.339,38.083 25.887,38.083
  TopLayer w0.6: 26.303,38.183 27.005,37.481 ; 26.518,38.933 27.053,38.933 27.282,38.933 ; 27.099,37.491 27.801,38.193
  TopLayer w0.8: C3.2 27.053,37.481 27.053,38.5 27.053,38.543
  TopLayer w1.2: 30.77,39.94 L1.1@31.63,40.8
  TopLayer w1.4: 25.713,38.534 26.749,38.534 ; 27.053,38.534 27.574,38.534 28.711,39.671 32.525,39.671 L1.1
  TopLayer w3: D1.2@31.127,44.727 32.7,43.154 L1.1
NetC4_1: C4.1 C5.2 F1.2 R6.2 U2.7 | length 40.8
  TopLayer w0.6: 23.107,30.372 C5.2@23.809,31.074
  TopLayer w1.2: F1.2 14.455,32.955 C4.1 ; C4.1@17.31,30.1 C4.1 ; U2.7@24.05,33.328 24.05,31.408 C5.2 24.05,30.13 C4.1 ; R6.2@25.26,41.277 v1(25.26,42.354)
  BottomLayer w1.2: 24.05,30.13 20.333,30.13 18.68,31.783 18.68,40.363 20.67,42.354 v1(25.26,42.354)
  other v1: 23.8,29.85 24.3,29.85 23.8,30.35 24.3,30.35
NetC6_1: C6.1 R11.2 | length 1.2
  TopLayer w0.6: R11.2@21.526,41.173 C6.1@22.686,41.173
NetC6_2: C6.2 U2.3 | length 1.7
  TopLayer w0.6: U2.3@22.77,38.441 C6.2@22.77,40.164
NetC21_1: C21.1 R30.2 X2.2 | length 3.5
  TopLayer w0.2: R30.2 X2.2 41.664,8.306 C21.1
NetC23_1: C23.1 R29.2 X1.2 | length 2.4
  TopLayer w0.2: R29.2 41.592,13.58 X1.2 41.757,13.465 C23.1
NetC24_2: C24.2 R36.1 U5.1 | length 3.6
  TopLayer w0.915: U5.1@47.07,37.212 47.07,39.379 C24.2 R36.1@47.07,40.86
NetC25_2: C25.2 J2.1 R36.2 | length 2.3
  TopLayer w0.915: R36.2@47.07,42.04 C25.2 47.07,43.329 47.07,43.399 J2.1
NetD2_2: D2.2 D3.2 F1.1 | length 8.3
  TopLayer w1.2: F1.1 D2.2@14.455,41.3 ; D2.2@14.535,41.44 D2.2 16.947,41.44 17.65,42.143 D3.2
NetD4_1: D4.1 R21.1 | length 3.1
  TopLayer w0.5: R21.1 D4.1
NetD4_3: D4.3 R20.1 | length 3.1
  TopLayer w0.5: R20.1 D4.3
NetD5_1: D5.1 R22.1 | length 1.3
  TopLayer w0.2: R22.1 69.05,7.414 D5.1
NetP6_5: P6.5 R27.2 | length 2.2
  TopLayer w0.2: R27.2 53.6,4 54.1,4.5 P6.5
NetP12_2: P12.2 R35.2 | length 13.8
  TopLayer w1.2: R35.2 4.99,30.768 4.99,22.69 5.85,21.83 P12.2@7.88,21.83
NetR1_1: R1.1 R2.2 U2.4 | length 3.2
  TopLayer w0.2: 20.123,38.283 20.486,38.646
  TopLayer w0.5: R1.1 20,38.283 R2.2@20,38.831
  TopLayer w0.6: R2.2@20.207,38.838 20.486,38.838 ; 20.486,38.864 U2.4@21.25,38.864 ; 21.09,38.821 U2.4@21.453,38.458
NetR4_2: R4.2 R5.2 U1.1 | length 2.5
  TopLayer w0.6: R4.2@11.734,24.721 U1.1@14.216,24.721
NetR6_1: R6.1 R7.2 U2.2 | length 3.9
  TopLayer w0.6: 24.031,39.473 24.733,40.175 ; U2.2@24.04,38.441 R7.2@24.04,40.154 ; R7.2 R6.1@25.196,40.173
NetR8_2: R8.2 U2.6 | length 1.4
  TopLayer w0.6: R8.2@22.77,31.664 U2.6@22.77,33.041
NetR10_2: R10.2 R12.2 U3.1 | length 2.5
  TopLayer w0.6: R10.2@11.688,20.225 R12.2 U3.1
NetR15_2: R15.2 R16.2 U4.1 | length 2.5
  TopLayer w0.6: R15.2@11.697,15.725 R16.2 U4.1
NetR24_1: R24.1 SW1.2 | length 4.2
  TopLayer w0.5: R24.1 74.525,43.826 SW1.2
NetR25_1: R25.1 SW2.2 | length 4.2
  TopLayer w0.5: R25.1 74.525,33.826 SW2.2
NRST: C14.2 IC2.7 P8.2 | length 19.3
  TopLayer w0.2: IC2.7 37.725,15.745 38.755,15.745 38.76,15.75 38.922,15.75 C14.2 39.072,15.75 39.072,15.528 39.27,15.33 42.35,15.33 43.78,13.9 43.78,5.43 42.85,4.5 P8.2
OSC32-IN: C20.1 IC2.3 X2.1 | length 7.9
  TopLayer w0.2: IC2.3 37.762,13.708 38.594,13.708 38.85,13.453 X2.1 38.536,8.306 C20.1
OSC32-OUT: IC2.4 R30.1 | length 6
  TopLayer w0.2: IC2.4 37.746,14.224 38.645,14.224 39.25,13.619 39.25,10.56 39.486,10.324 R30.1
OSO_IN: C22.1 IC2.5 X1.1 | length 5.5
  TopLayer w0.2: IC2.5 37.738,14.732 38.702,14.732 39.65,13.784 39.65,12.582 39.767,12.465 X1.1 ; C22.1 X1.1@40.592,12.465
OSO_OUT: IC2.6 R29.1 | length 3.1
  TopLayer w0.2: IC2.6@37.72,15.232 37.752,15.2 38.81,15.2 39.431,14.579 R29.1
RESET: C17.1 P4.4 SW3.1 U5.12 | length 24.3
  TopLayer w0.2: U5.12 47.102,13.27 48.15,13.27 48.555,12.865 48.555,7.334 46.995,5.774 SW3.1 49.445,4.619
  TopLayer w0.5: v1(49.695,4.294) C17.1
  BottomLayer w0.2: v1(49.695,4.294) 50.295,4.294 52.121,6.12 57.69,6.12 P4.4
RS485-DE: IC2.33 P11.2 P11.3 U6.2 U6.3 | length 23.4
  TopLayer w0.2: v2(26.434,10.5) 26.434,13.057 27.627,14.25 IC2.33
  TopLayer w0.65: U6.2 P11.2@24.222,8.76 ; U6.3@20.383,10.03 P11.3@24.26,10.03 ; 23.802,9.18 P11.2@24.222,8.76 ; P11.2 P11.2@24.222,8.76 ; P11.2@24.7,8.76 24.482,8.76 P11.2@24.222,8.76
  TopLayer w1.4: 20.377,9.44 24.207,9.44 ; P11.2 24.482,8.76 P11.3
  TopLayer w1.525: 20.157,9.208 20.157,9.57
  BottomLayer w0.2: P11.3 v2(26.434,10.5)
RXD: P6.2 U5.4 | length 29.8
  TopLayer w0.2: U5.4 53.879,23.702 60.929,16.652 v3(60.929,16.634)
  BottomLayer w0.2: v3(60.929,16.634) 60.929,10.57 62.07,9.429 62.07,5.5 P6.2
SPI2_MISO: IC2.27 P13.2 | length 5.1
  TopLayer w0.2: P13.2 25.9,16.5 26.65,17.25 IC2.27
SPI2_MOSI: IC2.28 P13.1 | length 5.7
  TopLayer w0.2: P13.1 25.482,15.5 26.732,16.75 IC2.28
SPI2_NSS: IC2.25 P13.4 | length 5.7
  TopLayer w0.2: P13.4 26.732,18.25 IC2.25
SPI2_SCK: IC2.26 P13.3 | length 5.1
  TopLayer w0.2: P13.3 25.9,18.5 26.6,17.8 28.489,17.8 29.194,17.8 IC2.26
SWCLK: IC2.37 P5.2 | length 7.7
  TopLayer w0.2: P5.2 30.732,6.75 IC2.37
SWCLK-W: P4.3 U5.17 | length 5.5
  TopLayer w0.2: P4.3 57.07,8.84 57.76,9.53 60.942,9.53 U5.17
SWD-W: P4.2 U5.18 | length 12.5
  TopLayer w0.2: P4.2 55.07,10.77 56.03,11.73 61.26,11.73 62.27,10.72 U5.18
SWDIO: IC2.34 P5.3 | length 11.2
  TopLayer w0.2: P5.3 27.28,5.298 27.28,13.184 27.836,13.74 29.234,13.74 IC2.34
TXD: P6.3 U5.5 | length 27.4
  TopLayer w0.2: U5.5 53.368,22.402 v3(59.135,16.634)
  BottomLayer w0.2: P6.3 60.07,5.5 60.07,9.482 59.135,10.417 v3(59.135,16.634)
UART1-RX: IC2.31 P11.1 R31.1 U6.1 | length 16.2
  TopLayer w0.2: U6.1@20.162,7.495 R31.1 23.487,7.495 P11.1 25.588,7.606 25.588,12.921 26.307,13.64 27.917,15.25 IC2.31
UART1-TX: IC2.30 P11.4 R33.1 U6.4 | length 10.9
  TopLayer w0.2: U6.4 22.077,11.3 R33.1 23.287,11.305 P11.4 25.894,13.912 27.682,15.7 29.194,15.7 IC2.30
UART3_RX: IC2.22 P9.1 | length 10.6
  TopLayer w0.2: v2(26.512,22.44) 30.827,22.44 31.715,21.553 31.715,20.495 31.722,20.488
  BottomLayer w0.2: v2(26.512,22.44) P9.1
UART3_TX: IC2.21 P9.2 | length 10.3
  TopLayer w0.2: v2(27.45,23.3) 30.79,23.3 32.222,21.868 32.222,20.488
  BottomLayer w0.2: v2(27.45,23.3) 27.45,25.388 P9.2
USART2-RX: IC2.13 P10.2 R26.1 U5.7 | length 23.1
  TopLayer w0.2: 36.222,20.488 36.222,24.16 P10.2 ; v3(42,19.802) R26.1 ; R26.1@42.668,19.952 42.818,19.802 U5.7
  BottomLayer w0.2: P10.2 39.512,27.45 41.15,27.45 42,26.6 v3@42,19.786
USART2-TX: IC2.12 P10.1 R23.1 U5.6 | length 18.9
  TopLayer w0.2: IC2.12@38.13,18.33 38.32,18.52 ; IC2.12@38.353,18.3 38.353,18.52 38.353,21.451 38.508,21.45 ccw(c38.512,22.45) 39.219,23.157 40.508,24.446 ; P10.1 40.508,26.446 40.508,24.446 ; R23.1 41.88,21.102 41.512,21.47 41.512,23.442 40.508,24.446 ; R23.1@42.668,21.252 42.818,21.102 U5.6
WISUN-KEY0: U5.16
WISUN-LED1: R22.2 U5.15 | length 28.1
  TopLayer w0.2: U5.15 49.42,12.64 51.444,14.664 65.646,14.664 67.775,12.535 R22.2
pads on no net: IC2.1 IC2.2 IC2.29 IC2.32 IC2.39 IC2.40 IC2.42 IC2.45 IC2.46 J1.3 U5.8 U5.9 U5.10 U5.11 U5.22 U5.23 U5.24 U5.25 U5.26 U5.27 U5.28 U5.29 U5.30 U5.31 U5.32 U5.33 U5.34 U5.35 U5.36

## Polygon pours and split planes (outlines as drawn)
GND on BottomLayer "TopLayer-No Net 1" (hatched 90Degree grid 0.2 track 0.2, remove dead copper, pour order 1001): 79.99,0.01 79.99,50.01 -0.01,50.01 -0.01,0.01
GND on TopLayer "TopLayer-No Net 1" (hatched 90Degree grid 0.2 track 0.2, remove dead copper, pour order 1000): 79.973,0.01 79.973,50.01 -0.027,50.01 -0.027,0.01

## Keep-outs
KeepOutLayer:
  lines w0.127: 0,0 80,0 80,50 0,50 0,0
  lines w0.254: -5.267,0.8 -5,0 ; -5.267,49.2 -5,50 ; -5.254,0 -4.746,0 ; -5.254,50 -4.746,50 ; -5,22.97 -5,0 ; -5,27.03 -5,50 ; -4.733,0.8 -5,0 ; -4.733,49.2 -5,50 ; 0,-5.254 0,-4.746 ; 0.8,-5.267 0,-5 ; 0.8,-4.733 0,-5 ; 37.97,-5 0,-5 ; 42.03,-5 80,-5 ; 79.2,-5.267 80,-5 ; 79.2,-4.733 80,-5 ; 80,-5.254 80,-4.746
  text "50mm" at -4.5,23.224 h0.8 r90
  text "80mm" at 38.224,-5.5 h0.8

## Other copper
TopLayer:
  pour cut-out: 80.071,47.551 80.071,50.065 -0.057,50.065 -0.057,47.561
  pour cut-out: 36.85,40.497 36.85,32.197 28.55,32.197 28.55,40.497
  pour cut-out: 29.512,43.186 29.512,46.786 27.512,46.786 27.512,46.736 27.522,43.186
  pour cut-out: 20.888,43.192 20.888,46.792 18.888,46.792 18.888,46.742 18.898,43.192
  pour cut-out: 36.85,40.497 36.85,32.197 28.55,32.197 28.55,40.497
  pour cut-out: 39.4,7.52 40.802,7.52 40.802,9.775 39.4,9.775
  pour cut-out: 13.55,45.45 15.35,45.45 15.35,42.25 13.55,42.25
  pour cut-out: 80.064,-0.005 80.064,2.509 -0.064,2.509 -0.064,0.005
BottomLayer:
  pour cut-out: 80.065,47.553 80.065,50.067 -0.063,50.067 -0.063,47.563
  pour cut-out: 80.064,-0.074 80.064,2.44 -0.064,2.44 -0.064,-0.064

## Silkscreen, mask and mechanical layers (free items; w line width, h text height)
TopOverlay:
  lines w0.127: 0,2.5 80,2.5 ; 0,47.5 80,47.5
  text "07-24V" at 0.2,34.1 h0.5
  text "+" at 30.345,27.79 h0.5
  text "3V3" at 30.846,27.79 h0.5
  text "-" at 32.345,27.79 h0.5
  text "RX''" at 25.804,27.762 h0.5
  text "TX''" at 27.804,27.762 h0.5
  text "RX'" at 37.97,27.75 h0.5
  text "TX'" at 39.97,27.75 h0.5
  text "GND" at 10.7,26.244 h0.5 r90
  text "DI1" at 23.2,25.908 h0.5 r90
  text "ADC_IN1" at 36.971,24 h0.5
  text "D!2" at 26.25,23.95 h0.5 r90
  text "DI3" at 23.2,21.825 h0.5 r90
  text "ADC_IN2" at 38.888,20.46 h0.5
  text "12V/UND" at 10.7,20.206 h0.5 r90
  text "NSS" at 26.307,19.834 h0.5 r90
  text "SCK" at 26.307,17.834 h0.5 r90
  text "SPI" at 27.7,16.567 h0.8 r90
  text "MISO" at 26.307,15.625 h0.5 r90
  text "DI1/UND" at 10.7,15.167 h0.5 r90
  text "MOSI" at 26.307,13.667 h0.5 r90
  text "TX" at 26.307,12.083 h0.5 r90
  text "DI2/D-" at 10.7,10.295 h0.5 r90
  text "DE" at 26.307,10.083 h0.5 r90
  text "DE" at 26.307,8.083 h0.5 r90
  text "RX" at 26.307,6.083 h0.5 r90
  text "I2C" at 33.482,5.8 h0.8
  text "VCC" at 52.404,5.755 h0.5
  text "SWD" at 54.404,5.755 h0.5
  text "CLK" at 56.404,5.755 h0.5
  text "RST" at 58.404,5.755 h0.5
  text "MODE" at 60.154,5.755 h0.5
  text "GND" at 62.404,5.755 h0.5
  text "DI3/D+" at 10.7,5.215 h0.5 r90
  text "WS485H-V1" at 78.6,4.74 h1.8 r90
  text "BOOT" at 55.555,2.86 h0.3
  text "3V3" at 23.816,2.77 h0.5
  text "DIO" at 25.857,2.76 h0.5
  text "CLK" at 27.816,2.76 h0.5
  text "GND" at 29.816,2.76 h0.5
  text "SCL" at 31.816,2.76 h0.5
  text "SDA" at 33.416,2.76 h0.5
  text "SMBA" at 35.166,2.76 h0.5
  text "BOOT0" at 37.316,2.76 h0.5
  text "NRST" at 39.876,2.76 h0.5
  text "H" at 54.903,2.76 h0.5
  text "L" at 56.903,2.76 h0.5
  text "TXD" at 58.404,2.76 h0.5
  text "RXD" at 60.404,2.76 h0.5
  text "GND" at 62.404,2.76 h0.5
TopSolder:
  pour cut-out: 48,41
Mechanical1:
  lines w0.127: -2.01,0.62 -2.01,50.62 ; -0.01,25.62 79.99,25.62 ; 39.99,0.62 39.99,50.62 ; 81.99,0.62 81.99,50.62
  lines w0.254: -4.55,-0.38 -2.01,-0.38 ; -3.534,-0.888 -2.01,-0.38 ; -3.534,0.128 -2.01,-0.38 ; -2.01,-0.634 -2.01,-0.126 ; -0.01,-0.634 -0.01,-0.126 ; -0.01,51.755 -0.01,52.263 ; 1.514,-0.888 -0.01,-0.38 ; 1.514,0.128 -0.01,-0.38 ; 1.514,51.501 -0.01,52.009 ; 1.514,52.517 -0.01,52.009 ; 2.53,-0.38 -0.01,-0.38 ; 3.883,52.009 -0.01,52.009 ; 12.597,52.009 16.49,52.009 ; 14.966,51.501 16.49,52.009 ; 14.966,52.517 16.49,52.009 ; 18.014,51.501 16.49,52.009 ; 18.014,52.517 16.49,52.009 ; 37.843,52.009 16.49,52.009 ; 46.637,52.009 67.99,52.009 ; 66.466,51.501 67.99,52.009 ; 66.466,52.517 67.99,52.009 ; 69.514,51.501 67.99,52.009 ; 69.514,52.517 67.99,52.009 ; 70.511,52.009 67.99,52.009 ; 77.45,-0.799 79.99,-0.799 ; 77.469,52.009 79.99,52.009 ; 78.466,-1.307 79.99,-0.799 ; 78.466,-0.291 79.99,-0.799 ; 78.466,51.501 79.99,52.009 ; 78.466,52.517 79.99,52.009 ; 79.99,-1.053 79.99,-0.545 ; 79.99,51.755 79.99,52.263 ; 81.99,-1.053 81.99,-0.545 ; 83.514,-1.307 81.99,-0.799 ; 83.514,-0.291 81.99,-0.799 ; 84.53,-0.799 81.99,-0.799 ; 16.49,51.755 16.49,52.263 16.49,51.755 ; 67.99,51.755 67.99,52.263 67.99,51.755
  text "16.5mm" at 4.137,51.095 h1.52
  text "51.5mm" at 38.097,51.095 h1.52
  text "12mm" at 70.765,51.095 h1.52
  text "2mm" at -3.676,-4.037 h1.52
  text "2mm" at 78.324,-4.456 h1.52
Mechanical2:
  lines w0.2: 33.482,15.5 33.482,15.5
Mechanical13:
  rectangle: 22.99,3.12 42.49,24.12
  rectangle: 35.99,19.12 78.99,22.12